# Altium PCB Differential Pair Routing with IP and CM.PcbDoc
Units mm, origin at the board's own origin, x right, y up, seen from the top; angles counter-clockwise.
Board outline 63.5 x 50.8 mm, 4 copper layers (Top Layer, Internal Plane 1, Mid-Layer 2, Bottom Layer), stack 1.57 mm thick; 9 components, 11 nets, 56 pads, 6 vias.
Unrouted connection lines stored in the file: 9.
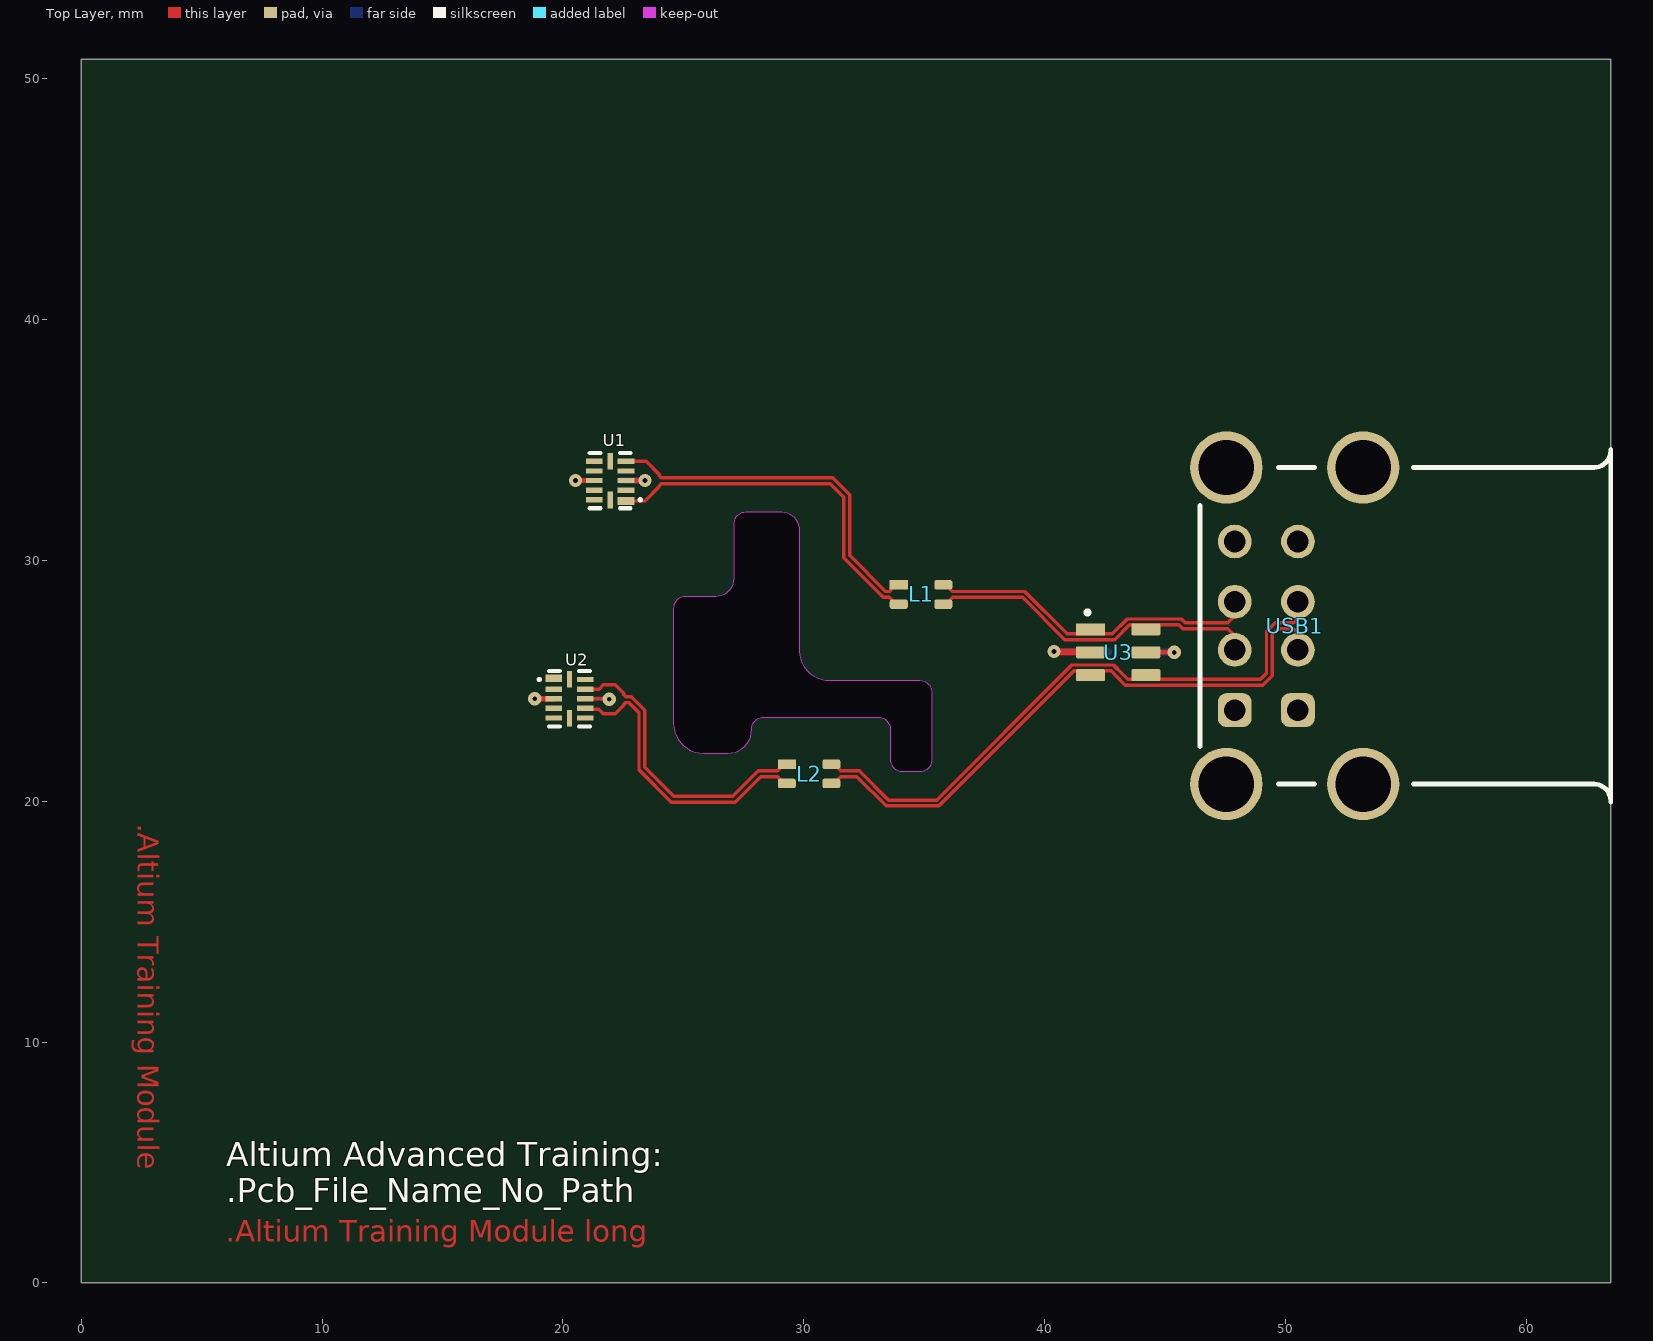
[diagram p0: Top Layer view]
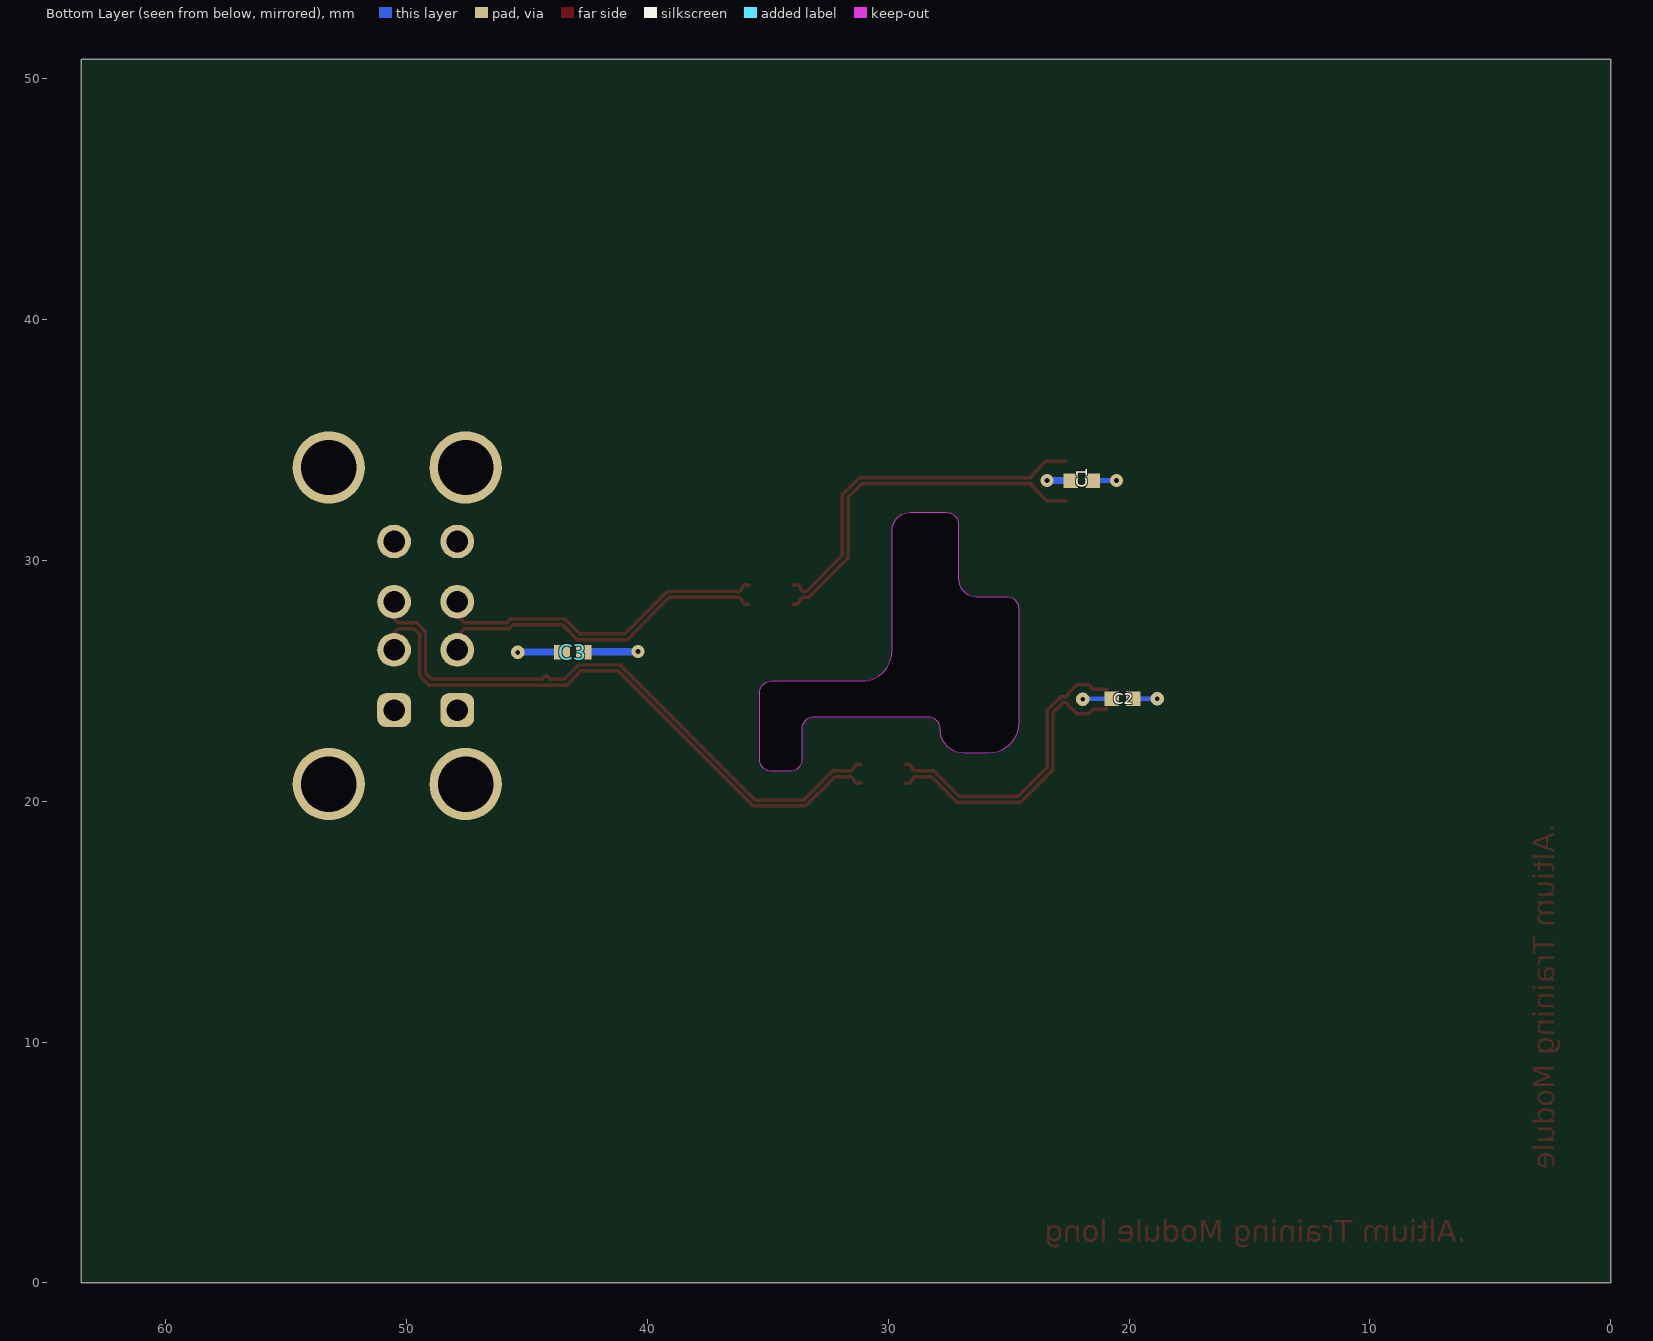
[diagram p1: Bottom Layer view, seen from below]
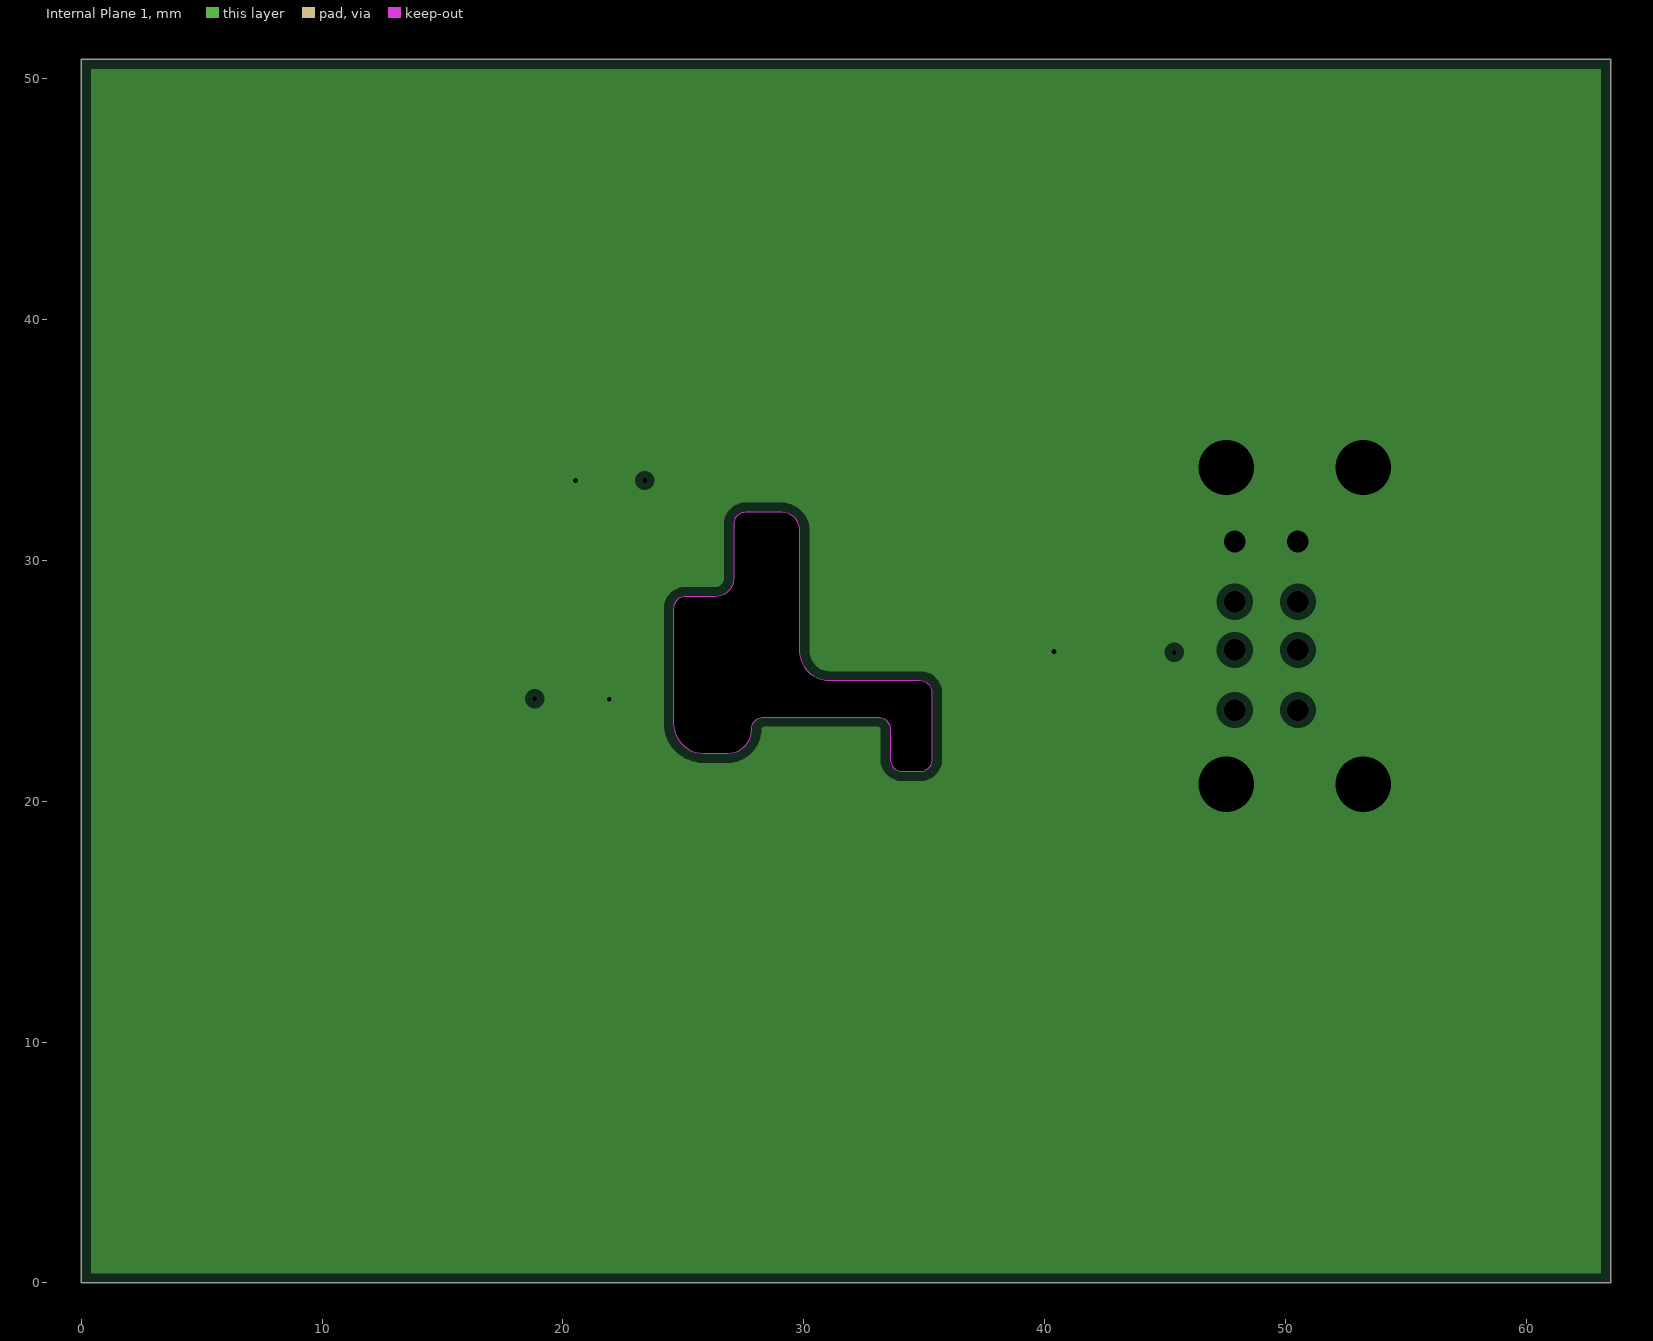
[diagram p2: Internal Plane 1, clearances drawn from the general rule]
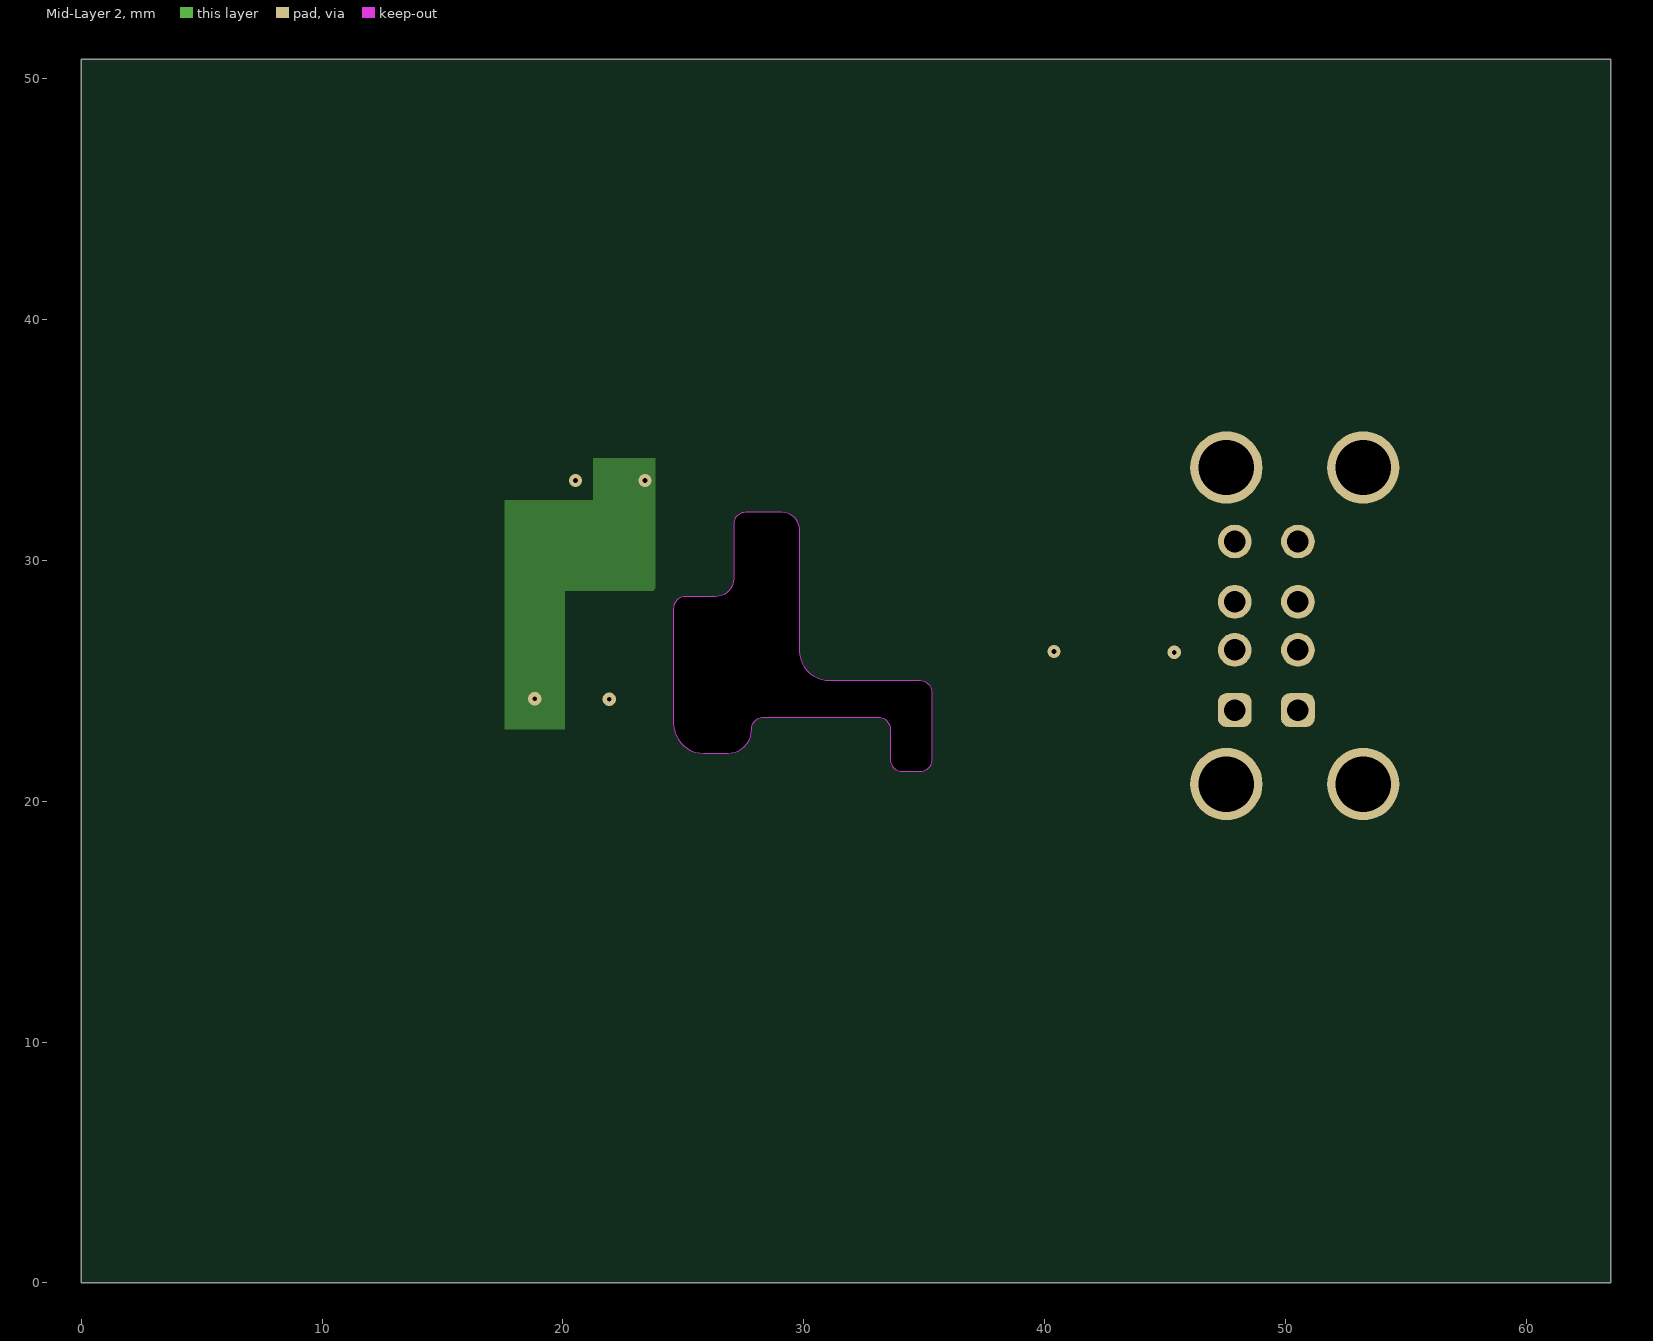
[diagram p3: Mid-Layer 2]

## Layer stack, top to bottom
Top Solder: solder mask 0.02, Solder Resist, Dk 2.5
Top Layer: signal copper 0.044
Dielectric  1: core 0.108, FR-4 (1 x 2116), Dk 3.6
Internal Plane 1: plane copper 0.033, net GND
Dielectric 2: prepreg 1.2, FR-4, Dk 4.2
Mid-Layer 2: signal copper 0.033
Dielectric  3: core 0.108, FR-4 (1 x 2116), Dk 3.6
Bottom Layer: signal copper 0.044
Bottom Solder: solder mask 0.02, Solder Resist, Dk 2.5

## Board outline
0,0 0,50.8 63.5,50.8 63.5,0
cut-out: 27.585,31.987 ccw(c27.585,31.487) 27.085,31.487 27.085,29.237 cw(c26.335,29.237) 26.335,28.487 25.085,28.487 ccw(c25.085,27.987) 24.585,27.987 24.585,23.237 ccw(c25.835,23.237) 25.835,21.987 26.835,21.987 ccw(c26.835,22.987) 27.835,22.987 cw(c28.335,22.987) 28.335,23.487 33.085,23.487 cw(c33.085,22.987) 33.585,22.987 33.585,21.737 ccw(c34.085,21.737) 34.085,21.237 34.835,21.237 ccw(c34.835,21.737) 35.335,21.737 35.335,24.487 ccw(c34.835,24.487) 34.835,24.987 31.085,24.987 cw(c31.085,26.237) 29.835,26.237 29.835,31.237 ccw(c29.085,31.237) 29.085,31.987

## Design rules (kind name [scope] priority, off if disabled: settings)
AssemblyTestPointUsage [All] p1: isadvanced=TRUE
AssemblyTestpoint [All] p1: isadvanced=TRUE testpointundercomponent=TRUE minsize=1.016 maxsize=2.54 preferedsize=1.524 minholesize=0 maxholesize=1.016 preferedholesize=0.813 testpointgrid=0.025 usegrid=TRUE gridtolerance=0 allowsidetop=TRUE allowsidebottom=TRUE
Clearance Clearance_UQFN12 [HasFootprint('UQFN12') or HasFootprint('SOT23-6L')] p1: isadvanced=TRUE gap=0.1 ignorepadtopadclearanceinfootprint=FALSE
Clearance "Clearance_DiffPair Separation_1" [InDifferentialPairClass('All Differential Pairs')] p2: isadvanced=TRUE gap=0.102 ignorepadtopadclearanceinfootprint=FALSE
Clearance Clearance_DDR_GND_Polygons [IsRegion AND InNet ('GND') vs (IsRegion Or IsTrack or IsArc or IsVia) AND (InNetClass('DDR_ALL'))] p3: isadvanced=TRUE gap=0.508 ignorepadtopadclearanceinfootprint=FALSE
Clearance "Clearance_DiffPair Separation_GND planes" [(InDifferentialPairClass('All Differential Pairs')) and (not IsVia) vs IsRegion AND InNET('GND')] p4: isadvanced=TRUE gap=0.508 ignorepadtopadclearanceinfootprint=FALSE
Clearance Clearance_Keep_Out [OnLayer('Keep-Out Layer')] p5: isadvanced=TRUE gap=0.5 ignorepadtopadclearanceinfootprint=FALSE
Clearance Clearance_Fiducials [HasFootprint('FIDUCIAL_0.8MM')] p6: isadvanced=TRUE gap=0.4 ignorepadtopadclearanceinfootprint=FALSE
Clearance Clearance_NPTH [(ObjectKind = 'Pad') And (Layer = 'MultiLayer') And (Net = 'No Net') And (PadIsPlated = 'False')] p7: isadvanced=TRUE gap=0.3 ignorepadtopadclearanceinfootprint=FALSE
Clearance Clearance_Polys [IsRegion vs IsRegion Or IsTrack or IsArc or IsPad or IsFill] p8: isadvanced=TRUE gap=0.2 ignorepadtopadclearanceinfootprint=FALSE
Clearance Clearance_Pads_DPs [(InDifferentialPairClass('All Differential Pairs')) vs (IsPad AND HasFootprint('UQFN12')) or (IsPad AND HasFootprint('ACM2012')) or (IsPad AND HasFootprint('DISPLAYPORT_SOCKET_MOLEX')) or (IsPad AND HasFootprint('QFN50P300X300X50-16N'))or (IsPad AND HasFootprint('CC0402')) or (IsPad AND HasFootprint('RC0402')) or (IsPad AND HasFootprint('SSOP28')) or (IsPad AND HasFootprint('SOT23-6L')) or (IsPad AND HasFootprint('SOCKET-BGA400-SG-BGA-6052'))] p9: isadvanced=TRUE gap=0.1 ignorepadtopadclearanceinfootprint=FALSE
Clearance "Clearance same net" [All vs IsVia Or IsPad] p10: isadvanced=TRUE gap=0.1 ignorepadtopadclearanceinfootprint=FALSE
Clearance "Clearance_DiffPair Separation" [InDifferentialPairClass('All Differential Pairs')] p11: isadvanced=TRUE gap=0.38 ignorepadtopadclearanceinfootprint=FALSE
Clearance Clearance_1 [(ExistsOnLayer('Mid-Layer 2')) vs (ExistsOnLayer('Mid-Layer 2'))] p12: gap=0.254 ignorepadtopadclearanceinfootprint=FALSE sourcerule=54 cellrowname=All cellrowtype=0 cellcolname=All cellcoltype=0 innerlayers=TRUE
Clearance Clearance_2 [(ExistsOnLayer('Top Layer') Or ExistsOnLayer('Bottom Layer')) vs (ExistsOnLayer('Top Layer') Or ExistsOnLayer('Bottom Layer'))] p13: gap=0.254 ignorepadtopadclearanceinfootprint=FALSE sourcerule=54 cellrowname=All cellrowtype=0 cellcolname=All cellcoltype=0 outerlayers=TRUE
Clearance [All] p14: gap=0.254 ignorepadtopadclearanceinfootprint=FALSE except(0: Arc-Hole Track-Hole SMDPad-Hole THPad-Hole Via-Hole Fill-Hole Poly-Hole Region-Hole Text-Hole) ismatrix=TRUE
ComponentClearance [All] p1: isadvanced=TRUE gap=0.254 collisioncheckmode=3 verticalgap=0.254 showdistances=FALSE
DiffPairsRouting DifferentialPairsRouting_90R_DIFF [InDifferentialPairClass('90R_DIFF')] p1: isadvanced=TRUE maxlimit=0.102 minlimit=0.102 mostfreqgap=0.102 toplayer_minwidth=0.142 toplayer_maxwidth=0.142 toplayer_prefwidth=0.142 midlayer2_minwidth=0.079 midlayer2_maxwidth=0.079 midlayer2_prefwidth=0.079 bottomlayer_minwidth=0.142 bottomlayer_maxwidth=0.142 bottomlayer_prefwidth=0.142 impedanceprofiledriven=TRUE impedanceprofileid={A9BB88AF-1646-4F92-91FE-6DBE14C42430} impedanceprofilevalue=90.000000 maxuncoupledlength=15
DiffPairsRouting [All] p2: maxlimit=0.254 minlimit=0.254 mostfreqgap=0.254 toplayer_minwidth=0.381 toplayer_maxwidth=0.381 toplayer_prefwidth=0.381 midlayer2_minwidth=0.381 midlayer2_maxwidth=0.381 midlayer2_prefwidth=0.381 bottomlayer_minwidth=0.381 bottomlayer_maxwidth=0.381 bottomlayer_prefwidth=0.381 maxuncoupledlength=12.7
FabricationTestPointUsage [All] p1: isadvanced=TRUE valid=0 allowmultiple=FALSE
FabricationTestpoint [All] p1: isadvanced=TRUE side=3 testpointundercomponent=TRUE minsize=1.016 maxsize=2.54 preferedsize=1.524 minholesize=0 maxholesize=1.016 preferedholesize=0.813 testpointgrid=0.025 allowsidetop=TRUE allowsidebottom=TRUE usegrid=TRUE gridtolerance=0
FanoutControl Fanout_BGA [IsBGA] p1: isadvanced=TRUE bgadir=Out bgaviamode=Centered fanoutstyle=Auto fanoutdirection=Alternating viagrid=0.025 // Fanout_BGA (Default Rule)
FanoutControl Fanout_LCC [IsLCC] p2: isadvanced=TRUE bgadir=Out bgaviamode=Centered fanoutstyle=Auto fanoutdirection=Alternating viagrid=0.025 // Fanout_LCC (Default Rule)
FanoutControl Fanout_SOIC [IsSOIC] p3: isadvanced=TRUE bgadir=Out bgaviamode=Centered fanoutstyle=Auto fanoutdirection=Alternating viagrid=0.025 // Fanout_SOIC (Default Rule)
FanoutControl Fanout_Small [(CompPinCount < 5)] p4: isadvanced=TRUE bgadir=Out bgaviamode=Centered fanoutstyle=Auto fanoutdirection=OutThenIn viagrid=0.025 // Fanout_Small (Default Rule)
FanoutControl Fanout_Default [All] p5: isadvanced=TRUE bgadir=Out bgaviamode=Centered fanoutstyle=Auto fanoutdirection=Alternating viagrid=0.025 // Fanout_Default (Default Rule)
Height [All] p1: isadvanced=TRUE minheight=0 maxheight=25.4 prefheight=12.7
HoleSize [All] p1: isadvanced=TRUE absolutevalues=TRUE maxlimit=2.54 minlimit=0.025 maxpercent=80.000 minpercent=20.000
HoleToHoleClearance [All] p1: isadvanced=TRUE gap=0.254 allowstackedmicrovias=TRUE
LayerPairs [All] p1: isadvanced=TRUE enforce=TRUE
MatchedLengths MatchedLengths_90R_DIFF [InDifferentialPairClass('90R_DIFF')] p1: isadvanced=TRUE tolerance=0.5 checknetsindiffpair=TRUE checkdiffpairvsdiffpair=FALSE checkxsignals=FALSE checkothers=FALSE
MinimumSolderMaskSliver [All] p1: isadvanced=TRUE minsoldermaskwidth=0.254
NetAntennae [All] p1: isadvanced=TRUE netantennaetolerance=0
PasteMaskExpansion [All] p1: isadvanced=TRUE expansion=0
PlaneClearance PowerPlaneClearance_1 [(ObjectKind = 'Pad') And (Layer = 'MultiLayer') And (Net = 'No Net') And (PadIsPlated = 'False')] p1: isadvanced=TRUE clearance=0.3
PlaneClearance [All] p2: isadvanced=TRUE clearance=0.3
PlaneConnect "PlaneConnect on SFP age with islated copper" [(InComponent('CAGE1') AND ((ObjectKind = 'Pad') And (Rotation = '0.001')))] p1: isadvanced=TRUE planeconnectstyle=Direct reliefexpansion=0.508 reliefentries=2 reliefconductorwidth=0.254 reliefairgap=0.254
PlaneConnect [All] p2: isadvanced=TRUE pad.planeconnectstyle=Relief pad.reliefexpansion=0.508 pad.reliefentries=4 pad.reliefconductorwidth=0.254 pad.reliefairgap=0.254 via.planeconnectstyle=Direct via.reliefexpansion=0.508 via.reliefentries=4 via.reliefconductorwidth=0.254 via.reliefairgap=0.254
PolygonConnect [All] p1: connectstyle=Relief reliefconductorwidth=0.254 reliefentries=4 polygonreliefangle="90 Angle" airgapwidth=0.254
RoutingCorners [All] p1: isadvanced=TRUE cornerstyle=45-Degree minsetback=2.54 maxsetback=2.54
RoutingPriority [All] p1: isadvanced=TRUE routingpriority=0
RoutingVias [All] p1: holewidth=0.711 width=1.27 viastyle="Through Hole" minholewidth=0.711 minwidth=1.27 maxholewidth=0.711 maxwidth=1.27
ShortCircuit [All] p1: isadvanced=TRUE allowed=FALSE
SilkToSilkClearance [All] p1: isadvanced=TRUE silktosilkclearance=0.254
SilkToSolderMaskClearance [IsPad] p1: isadvanced=TRUE minsilkscreentomaskgap=0.254 clearancetoexposedcopper=TRUE
SolderMaskExpansion [All] p1: isadvanced=TRUE expansion=0 istentingtop=FALSE
SupplyNets "Schematic Supply Nets_2" [InNet('3v3_SB')] p1: isadvanced=TRUE voltage=0.000
SupplyNets "Schematic Supply Nets_1" [InNet('5v0_USB')] p2: isadvanced=TRUE voltage=0.000
SupplyNets "Schematic Supply Nets" [InNet('GND')] p3: isadvanced=TRUE voltage=0.000
UnRoutedNet [All] p1: isadvanced=TRUE
UnpouredPolygon [All] p1: isadvanced=TRUE
Width [All] p1: maxlimit=0.254 minlimit=0.254 preferedwidth=0.254
3 further rules are at their usual default settings.

## Classes and differential pairs
differential pair class 90R_DIFF: DIFF_D1 DIFF_D2 DIFF_J_D1 DIFF_J_D2
differential pair DIFF_J_D2: +J_D2_P -J_D2_N
differential pair DIFF_J_D1: +J_D1_P -J_D1_N
differential pair DIFF_D2: +D2_P -D2_N
differential pair DIFF_D1: +D1_P -D1_N

## Components (designator, comment, footprint, x,y, rotation, side; value= is the part's Value field where it differs from the comment)
C1 "100nF" CC0402#1 21.961,33.307 r0 bottom
C2 "100nF" CC0402#1 20.269,24.249 r180 bottom
C3 "100nF" CC0402#2 43.087,26.188 r180 bottom
L1 "90R@100MHz" ACM2012 34.865,28.578 r0 top
L2 "90R@100MHz" ACM2012 30.218,21.135 r0 top
U1 "NCN1154" UQFN12 21.961,33.307 r90 top
U2 "NCN1154" UQFN12 20.269,24.249 r270 top
U3 "DVIULC6-4SC6" SOT23-6L 41.9,27.128 r270 top
USB1 "DUAL USB" USB-A_RA_DUAL 63.5,27.278 r90 top

## Footprints (in the part's own frame and the unit in brackets; to place one, negate y for a bottom-side part, rotate by r counter-clockwise, add the part's x,y. Pads: shape width x height; smd on the part's side, far side on the other; paste and mask are expansions set on the pad)
ACM2012 [mm] "Common Mode Choke 0805 package"
  rect 0.75x0.4 smd: 1(-0.925,0.4)
  rrect50% 0.75x0.4 smd: 2(-0.925,-0.4) 3(0.925,-0.4) 4(0.925,0.4)
  body extent -1.1,-0.7 1.1,0.7, height 1.3
CC0402#1 [mm] "Standard 0402 Capacitor 0.5mm thick"
  rect 0.6x0.6 smd: 1(-0.45,0) 2(0.45,0)
  body extent -0.53,-0.28 0.53,0.28, height 0.51
CC0402#2 [mm] "Standard 0402 Capacitor 0.5mm thick"
  rect 0.65x0.6 smd: 1(-0.45,0) 2(0.45,0)
  body extent -0.53,-0.28 0.53,0.28, height 0.51
SOT23-6L [mm]
  rect 0.5x1.2 smd: 1(0,0)
  rrect25% 0.5x1.2 smd: 2(0.95,0) 3(1.9,0) 4(1.9,2.3) 5(0.95,2.3) 6(0,2.3)
  silkscreen extent -0.78,-0.2 -0.63,-0.05, body extent -0.58,-0.35 2.48,2.65, height 1.46
UQFN12 [mm] "UQFN12 1.7x2.0, 0.4P - CASE 523AE-01"
  rect 0.32x0.69 smd: 1(-0.85,-0.655)
  rect 0.22x0.69 smd: 2(-0.4,-0.655) 3(0,-0.655) 4(0.4,-0.655) 5(0.8,-0.655) 7(0.8,0.655) 8(0.4,0.655) 9(0,0.655) 10(-0.4,0.655) 11(-0.8,0.655)
  rect 0.69x0.22 smd: 6(0.805,0) 12(-0.805,0)
  silkscreen extent -1.15,-1.26 1.15,0.85, body extent -1,-0.85 1,0.85, height 0.56
USB-A_RA_DUAL [mm] "Dual Stacked USB Type A Connector"
  rrect50% 1.4x1.4 hole 0.9: 1B(-3.5,12.99) 1T(-3.5,15.61)
  round 1.4 hole 0.9: 2B(-1,12.99) 2T(-1,15.61) 3B(1,12.99) 3T(1,15.61) 4B(3.5,12.99) 4T(3.5,15.61)
  round 3 hole 2.3: 5B(-6.57,10.28) 5B(6.57,10.28) 5T(-6.57,15.96) 5T(6.57,15.96)
  silkscreen extent -7.32,0 7.32,17.05, body extent -7.38,0 7.38,17, height 2.05

## Part data
C1 C2 C3: library part CAP_100nF, "Cap, 100nF, X7R, 16V, ±10%, CC0402"
L1 L2: library part FILTER, "CMNCK, 90R@100MHz, 50V, 400mA, ACM2012"
U1 U2: library part USB_UART, "3:1 High-Speed USB /UART/Auido Mux"
U3: library part ESD_Protector, "4-chl Ultra-Low Capacitance ESD protector with TVS diode"
USB1: library part USB, "RoHS compliant or Toby - KUSB-AS2N-WHT or Toby - KUSB-AS2N-BLK or 2EUK - UBAR-08S or 2EUK (Oupiin) - 8968-A08CRW"

## Via types
v1: diameter 0.55, hole 0.2, Top Layer to Bottom Layer, 6 vias

## Nets (pads, with @x,y where several pads share a name; then routed paths per layer and width w, separated by ;. In a path a pad name is that pad's centre, name@x,y a point inside that pad or via, vN(x,y) a via of type N, cw(c..) or ccw(c..) an arc to the next point about the centre after c; other vN are vias at no path point)
3v3_SB: C1.2 C2.2 U1.3 U2.3 | length 3.6
  Top Layer w0.2: U1.3 22.617,33.309 23.4,33.309 v1(23.401,33.31)
  Top Layer w0.22: v1@18.831,24.249 U2.3
  Top Layer w0.3: v1(18.828,24.247) v1@18.831,24.249
  Bottom Layer w0.2: v1(18.828,24.247) 19.816,24.247 C2.2
  Bottom Layer w0.3: C1.2 v1@23.401,33.307
5v0_USB: C3.1 U3.5 | length 3
  Top Layer w0.2: U3.5 44.201,26.177 45.377,26.177 v1(45.379,26.176)
  Bottom Layer w0.3: C3.1 v1@45.379,26.188
D1_N: L1.2 U1.1 | length 15.2
  Top Layer w0.142: U1.1 23.397,32.457 24.001,33.061 24.001,33.093 24.084,33.177 31.096,33.177 31.656,32.617 31.656,30.1 33.3,28.456 33.553,28.456 33.654,28.355 33.654,28.305 33.78,28.178 L1.2
D1_P: L1.1 U1.5 | length 15.2
  Top Layer w0.142: U1.5 23.452,34.107 24.001,33.558 24.001,33.504 24.084,33.42 31.197,33.42 31.9,32.718 31.9,30.201 33.401,28.7 33.553,28.7 33.636,28.783 33.636,28.849 33.765,28.978 L1.1
D2_N: L2.2 U2.8 | length 12.4
  Top Layer w0.142: U2.8 20.953,23.82 21.482,23.82 21.676,23.625 22.174,23.625 22.525,23.976 22.525,24.01 22.608,24.093 22.726,24.093 23.156,23.662 23.156,21.299 24.499,19.956 27.156,19.956 28.213,21.013 28.905,21.013 29.007,20.912 29.007,20.862 29.133,20.735 L2.2
D2_P: L2.1 U2.10 | length 12.4
  Top Layer w0.142: U2.10 21.501,24.649 21.676,24.825 22.174,24.825 22.525,24.474 22.525,24.42 22.608,24.337 22.827,24.337 23.4,23.764 23.4,21.4 24.6,20.2 27.055,20.2 28.112,21.257 28.905,21.257 28.989,21.34 28.989,21.406 29.118,21.535 L2.1
GND: C1.1 C2.1 C3.2 U1.9 U2.9 U3.2 USB1.4B USB1.4T USB1.5B USB1.5T | length 7.6
  Top Layer w0.14: U2.9 21.901,24.249 v1(21.925,24.225)
  Top Layer w0.22: v1(20.523,33.307) U1.9
  Top Layer w0.3: v1(40.381,26.206) 40.394,26.192 41.886,26.192 U3.2
  Bottom Layer w0.2: v1(20.523,33.307) C1.1 ; C2.1 20.721,24.252 v1@21.709,24.252
  Bottom Layer w0.3: v1(40.381,26.206) 40.39,26.197 42.628,26.197 C3.2
J_D1_N: L1.3 U3.6 USB1.2T | length 14
  Top Layer w0.142: L1.3 35.949,28.178 36.076,28.305 36.076,28.355 36.177,28.456 39.081,28.456 40.83,26.707 42.91,26.707 43.519,27.316 44.099,27.316 45.567,27.316 45.727,27.156 47.593,27.156 47.89,26.859 USB1.2T
J_D1_P: L1.4 U3.1 USB1.3T | length 14
  Top Layer w0.142: L1.4 35.949,28.978 36.076,28.852 36.076,28.801 36.177,28.7 39.182,28.7 40.931,26.951 42.809,26.951 43.418,27.56 43.998,27.56 44.2,27.56 45.081,27.56 45.668,27.56 45.828,27.4 47.012,27.4 47.593,27.4 47.89,27.697 USB1.3T
J_D2_N: L2.3 U3.3 USB1.2B | length 25.4
  Top Layer w0.142: L2.3 31.302,20.735 31.429,20.862 31.429,20.912 31.53,21.013 32.2,21.013 33.413,19.8 35.61,19.8 41.215,25.405 41.9,25.405 42.753,25.405 42.966,25.193 43.351,24.807 49.057,24.807 49.45,25.2 49.45,26.938 49.668,27.156 50.339,27.156 50.51,26.985 USB1.2B
J_D2_P: L2.4 U3.4 USB1.3B | length 25.5
  Top Layer w0.142: L2.4 31.302,21.535 31.429,21.408 31.429,21.358 31.53,21.257 32.301,21.257 33.514,20.044 35.509,20.044 41.114,25.65 41.799,25.65 42.854,25.65 43.21,25.294 43.452,25.051 44.023,25.051 U3.4 44.377,25.051 48.956,25.051 49.205,25.301 49.205,27.039 49.566,27.4 50.339,27.4 50.51,27.572 USB1.3B
pads on no net: U1.2 U1.4 U1.6 U1.7 U1.8 U1.10 U1.11 U1.12 U2.1 U2.2 U2.4 U2.5 U2.6 U2.7 U2.11 U2.12 USB1.1B USB1.1T

## Polygon pours and split planes (outlines as drawn)
3v3_SB on Mid-Layer 2 "3V3_SB_L03_P000" (solid, pour order 0): 17.585,32.5 21.25,32.5 21.25,34.237 23.835,34.237 23.835,28.737 20.085,28.737 20.085,22.987 17.585,22.987 17.585,31.487
GND on Internal Plane 1 (split plane): 63.098,0.402 0.402,0.402 0.402,50.398 63.098,50.398

## Other copper
Top Layer:
  text ".Altium Training Module" at 2.06,19.053 h1.5 r270
  text ".Altium Training Module long" at 6,1.413 h1.52

## Silkscreen, mask and mechanical layers (free items; w line width, h text height)
Top Overlay:
  text "Altium Advanced Training: / .Pcb_File_Name_No_Path" at 6.025,3.35 h1
Board Shape:
  the board outline again, w0.635
Sheet:
  lines w0.127: -152.045,-100.175 -152.045,-95.197 -78.969,-95.197 -78.969,-100.175 -152.045,-100.175
  text ".Pcb_File_Name_No_Path" at 142.468,-77.018 h2.54
  text ".Altium Training Module" at 142.595,-81.125 h2.54
  text ".Altium Training" at 142.595,-86.205 h2.03
  text ".PCB_DWG_NO" at 179.425,-93.825 h2.54
  text ".Printout_Name" at -150.623,-98.829 h3.81
Mechanical 22:
  drawing of 113 lines, arcs and shapes, not listed
  text "REV:" at -91.468,133.886 h0.76
  text "DWG. NO." at -65.814,133.886 h0.76
  text "1" at -124.791,132.743 h1.78
  text "2" at -61.164,132.743 h1.78
  text "3" at 2.311,132.743 h1.78
  text "4" at 65.98,132.743 h1.78
  text "5" at 129.209,132.743 h1.78
  text "6" at 192.599,132.743 h1.78
  text ".PCB_REV" at -91.847,131.6 h1.27
  text ".PCB_DWG_NO" at -71.273,131.6 h1.27
  text "R" at 170.642,129.126 h1.93
  text "O" at 172.039,129.126 h1.93
  text "N" at 173.775,129.126 h1.93
  text "I" at 174.283,129.126 h1.93
  text "E" at 175.469,129.126 h1.93
  text "R" at 176.697,129.126 h1.93
  text "E" at 177.883,129.126 h1.93
  text "H" at 179.153,129.126 h1.93
  text "D" at 180.889,129.126 h1.93
  text "E" at 182.075,129.126 h1.93
  text "S" at 183.26,129.126 h1.93
  text "O" at 184.658,129.126 h1.93
  text "L" at 185.631,129.126 h1.93
  text "C" at 186.902,129.126 h1.93
  text "S" at 188.087,129.126 h1.93
  text "I" at 188.553,129.126 h1.93
  text "D" at 189.823,129.126 h1.93
  text "A" at 191.517,129.126 h1.93
  text "T" at 192.576,129.126 h1.93
  text "A" at 193.761,129.126 h1.93
  text "D" at 195.032,129.126 h1.93
  text "E" at 196.683,129.126 h1.93
  text "H" at 197.953,129.126 h1.93
  text "T" at 199.054,129.126 h1.93
  text "D" at 200.791,129.126 h1.93
  text "N" at 202.061,129.126 h1.93
  text "A" at 203.246,129.126 h1.93
  text "T" at 204.856,129.126 h1.93
  text "N" at 206.083,129.126 h1.93
  text "E" at 207.269,129.126 h1.93
  text "M" at 208.751,129.126 h1.93
  text "U" at 210.021,129.126 h1.93
  text "C" at 211.292,129.126 h1.93
  text "O" at 212.689,129.126 h1.93
  text "D" at 213.959,129.126 h1.93
  text "S" at 215.611,129.126 h1.93
  text "I" at 216.119,129.126 h1.93
  text "H" at 217.389,129.126 h1.93
  text "T" at 218.49,129.126 h1.93
  text "REVISIONS" at -97.181,128.298 h1.52
  text "Y" at 167.999,127.094 h1.93
  text "A" at 169.142,127.094 h1.93
  text "M" at 170.624,127.094 h1.93
  text "D" at 172.402,127.094 h1.93
  text "N" at 173.673,127.094 h1.93
  text "A" at 174.858,127.094 h1.93
  text "D" at 176.594,127.094 h1.93
  text "E" at 177.78,127.094 h1.93
  text "T" at 178.881,127.094 h1.93
  text "I" at 179.389,127.094 h1.93
  text "M" at 180.829,127.094 h1.93
  text "I" at 181.337,127.094 h1.93
  text "L" at 182.311,127.094 h1.93
  text "M" at 184.259,127.094 h1.93
  text "U" at 185.529,127.094 h1.93
  text "I" at 186.037,127.094 h1.93
  text "T" at 187.138,127.094 h1.93
  text "L" at 188.07,127.094 h1.93
  text "A" at 189.255,127.094 h1.93
  text "F" at 190.864,127.094 h1.93
  text "O" at 192.219,127.094 h1.93
  text "Y" at 193.871,127.094 h1.93
  text "T" at 194.972,127.094 h1.93
  text "R" at 196.2,127.094 h1.93
  text "E" at 197.385,127.094 h1.93
  text "P" at 198.571,127.094 h1.93
  text "O" at 199.944,127.094 h1.93
  text "R" at 201.214,127.094 h1.93
  text "P" at 202.4,127.094 h1.93
  text "E" at 204.051,127.094 h1.93
  text "H" at 205.321,127.094 h1.93
  text "T" at 206.422,127.094 h1.93
  text "S" at 208.074,127.094 h1.93
  text "I" at 208.582,127.094 h1.93
  text "H" at 210.318,127.094 h1.93
  text "T" at 211.419,127.094 h1.93
  text "I" at 211.885,127.094 h1.93
  text "W" at 213.621,127.094 h1.93
  text "E" at 214.764,127.094 h1.93
  text "R" at 216.034,127.094 h1.93
  text "E" at 217.22,127.094 h1.93
  text "H" at 218.49,127.094 h1.93
  text "DATE" at -126.772,125.123 h1.52
  text "REV" at -65.304,125.123 h1.52
  text "ZONE" at -56.922,125.123 h1.52
  text "E" at 173.581,125.061 h1.93
  text "R" at 174.851,125.061 h1.93
  text "A" at 176.037,125.061 h1.93
  text "S" at 177.688,125.061 h1.93
  text "T" at 178.789,125.061 h1.93
  text "H" at 180.017,125.061 h1.93
  text "G" at 181.415,125.061 h1.93
  text "I" at 181.923,125.061 h1.93
  text "R" at 183.151,125.061 h1.93
  text "O" at 185.056,125.061 h1.93
  text "N" at 186.326,125.061 h1.93
  text "." at 187.3,125.061 h1.93
  text "E" at 188.486,125.061 h1.93
  text "L" at 189.46,125.061 h1.93
  text "O" at 190.857,125.061 h1.93
  text "H" at 192.085,125.061 h1.93
  text "W" at 193.821,125.061 h1.93
  text "N" at 195.515,125.061 h1.93
  text "I" at 196.023,125.061 h1.93
  text "D" at 197.759,125.061 h1.93
  text "E" at 198.945,125.061 h1.93
  text "T" at 200.046,125.061 h1.93
  text "U" at 201.316,125.061 h1.93
  text "B" at 202.502,125.061 h1.93
  text "I" at 203.01,125.061 h1.93
  text "R" at 204.238,125.061 h1.93
  text "T" at 205.321,125.061 h1.93
  text "S" at 206.507,125.061 h1.93
  text "I" at 206.973,125.061 h1.93
  text "D" at 208.243,125.061 h1.93
  text "Y" at 209.937,125.061 h1.93
  text "L" at 210.911,125.061 h1.93
  text "E" at 212.096,125.061 h1.93
  text "E" at 213.24,125.061 h1.93
  text "R" at 214.51,125.061 h1.93
  text "F" at 215.611,125.061 h1.93
  text "E" at 217.305,125.061 h1.93
  text "B" at 218.49,125.061 h1.93
  text "APPROVED" at -139.599,124.996 h1.52
  text "DESCRIPTION" at -91.085,124.996 h1.52
  text "." at 169.721,123.029 h1.93
  text "N" at 170.949,123.029 h1.93
  text "E" at 172.135,123.029 h1.93
  text "V" at 173.32,123.029 h1.93
  text "I" at 173.828,123.029 h1.93
  text "G" at 175.226,123.029 h1.93
  text "E" at 176.782,123.029 h1.93
  text "E" at 177.967,123.029 h1.93
  text "T" at 179.068,123.029 h1.93
  text "N" at 180.296,123.029 h1.93
  text "A" at 181.482,123.029 h1.93
  text "R" at 182.752,123.029 h1.93
  text "A" at 183.938,123.029 h1.93
  text "W" at 185.674,123.029 h1.93
  text "D" at 187.368,123.029 h1.93
  text "E" at 188.553,123.029 h1.93
  text "I" at 189.061,123.029 h1.93
  text "L" at 189.993,123.029 h1.93
  text "P" at 191.178,123.029 h1.93
  text "M" at 192.661,123.029 h1.93
  text "I" at 193.169,123.029 h1.93
  text "R" at 194.905,123.029 h1.93
  text "O" at 196.302,123.029 h1.93
  text "S" at 197.953,123.029 h1.93
  text "S" at 199.139,123.029 h1.93
  text "E" at 200.325,123.029 h1.93
  text "R" at 201.595,123.029 h1.93
  text "P" at 202.781,123.029 h1.93
  text "X" at 203.924,123.029 h1.93
  text "E" at 205.11,123.029 h1.93
  text "R" at 206.888,123.029 h1.93
  text "O" at 208.285,123.029 h1.93
  text "D" at 210.021,123.029 h1.93
  text "E" at 211.207,123.029 h1.93
  text "V" at 212.393,123.029 h1.93
  text "R" at 213.663,123.029 h1.93
  text "E" at 214.849,123.029 h1.93
  text "S" at 216.034,123.029 h1.93
  text "E" at 217.22,123.029 h1.93
  text "R" at 218.49,123.029 h1.93
  text "ORIGINAL" at -92.99,121.694 h1.52
  text "A" at -66.066,121.694 h1.52
  text "D" at -153.95,103.711 h1.78
  text "D" at 221.97,103.711 h1.78
  text "C" at -153.95,43.259 h1.78
  text "C" at 221.97,43.259 h1.78
  text "B" at -153.95,-17.066 h1.78
  text "B" at 221.97,-17.066 h1.78
  text "DWG. NO." at -154.966,-32.232 h0.76 r90
  text ".PCB_DWG_NO" at -152.68,-37.691 h1.27 r90
  text "REV:" at -154.966,-57.886 h0.76 r90
  text ".PCB_REV" at -152.68,-58.265 h1.27 r90
  text ".PCB_PART_NUMBER" at -8.916,-59.281 h1.14
  text "PART NO." at -0.915,-59.281 h1.14
  text "UNLESS OTHERWISE SPECIFIED DIMENSIONS" at -1.423,-61.948 h1.14
  text "DATE" at -65.329,-62.001 h1.14
  text "APPROVALS" at -43.485,-62.001 h1.14
  text "2175 SALK AVENUE" at -121.692,-62.075 h1.14
  text "AND TOLERANCE ARE IN INCHES AND" at -2.82,-63.853 h1.14
  text "DESIGNER:" at -35.357,-64.033 h1.14
  text "SUITE 200" at -121.692,-64.361 h1.14
  text "APPLY TO THE FINISHED PART" at -5.614,-65.631 h1.14
  text ".PCB_DESIGNER_APP_DATE" at -62.078,-66.065 h1.02
  text ".PCB_DESIGNER" at -43.536,-66.065 h1.52
  text "CARLSBAD, CA 92008" at -121.692,-66.647 h1.14
  text "TOLERANCE ON:" at -11.71,-68.806 h1.14
  text "USA" at -121.692,-68.933 h1.14
  text "ENGINEER:" at -35.357,-69.113 h1.14
  text ".PCB_ENGINEER_APP_DATE" at -62.078,-70.891 h1.02
  text "ANGLES" at -26.569,-71.092 h1.02
  text "3 DEC. PLACE" at -12.98,-71.092 h1.02
  text "2 DEC. PLACE" at -1.423,-71.092 h1.02
  text ".PCB_ENGINEER" at -43.536,-71.145 h1.52
  text "TITLE:" at -73.813,-71.6 h1.14
  text "CHECKER:" at -35.357,-74.193 h1.14
  text ".PCB_ANG_TOL" at -25.68,-75.029 h1.52
  text ".PCB_3_DEC_TOL" at -13.869,-75.029 h1.52
  text ".PCB_2_DEC_TOL" at -2.82,-75.029 h1.52
  text ".Pcb_File_Name_No_Path" at -77.369,-76.045 h2.54
  text ".PCB_CHECKER_APP_DATE" at -62.027,-76.073 h1.02
  text ".PCB_CHECKER" at -43.536,-76.225 h1.52
  text "THIRD ANGLE PROJECTION" at 18.211,-76.555 h1.02
  text "A" at -153.95,-77.264 h1.78
  text "A" at 221.97,-77.264 h1.78
  text "MATERIAL:" at -1.423,-78.664 h1.14
  text "REFERENCE DOCUMENTS" at -45.009,-79.781 h1.14
  text ".Altium Training Module" at -77.369,-81.125 h2.54
  text "BOM:" at -35.357,-82.321 h1.14
  text "SEE NOTES" at -10.719,-83.718 h1.52
  text ".DOC_NO_BOM" at -43.485,-84.607 h1.52
  text ".Altium Training" at -77.369,-86.205 h2.03
  text "ASSY DWG:" at -35.357,-87.147 h1.14
  text ".DOC_NO_ASSY_DWG" at -43.485,-89.433 h1.52
  text "REV:" at -146.584,-90.269 h1.14
  text "DWG NO:" at -106.96,-90.269 h1.14
  text "CAGE CODE:" at -81.56,-90.269 h1.14
  text "SIZE:" at -75.337,-90.269 h1.14
  text "FAB DWG:" at -35.357,-91.973 h1.14
  text ".PCB_DWG_NO" at -112.675,-93.825 h2.54
  text "B" at -76.353,-93.952 h2.54
  text ".DOC_NO_FAB_DWG" at -43.485,-94.132 h1.52
  text ".CAGE_CODE" at -85.878,-94.206 h2.54
  text ".PCB_REV" at -146.081,-94.375 h2.54
  text "SCHEMATIC:" at -35.357,-96.799 h1.14
  text "PRINT DATE:" at -1.22,-96.825 h1.14
  text "SHEET:" at -133.376,-98.272 h1.14
  text "FILE NAME:" at -89.18,-98.272 h1.14
  text "SCALE:" at -73.813,-98.27 h1.14
  text ".PRINT_DATE" at -11.583,-98.577 h1.52
  text ".Printout_Name" at 217.373,-98.829 h3.81
  text ".DOC_NO_SCH_DWG" at -43.485,-99.085 h1.52
  text ".PCB_FILE_NAME_NO_PATH" at -97.892,-99.415 h1.52
  text "OF" at -144.806,-99.542 h1.14
  text ".PCB_SCALE" at -80.671,-99.54 h1.52
  text "DOC-104 REV A" at 218.795,-101.244 h0.51
  text "1" at -124.791,-103.477 h1.78
  text "2" at -61.164,-103.477 h1.78
  text "3" at 2.311,-103.477 h1.78
  text "4" at 65.98,-103.477 h1.78
  text "5" at 129.209,-103.477 h1.78
  text "6" at 192.599,-103.477 h1.78